# EAGLE board tvbgone-2layer (EAGLE 6.4)
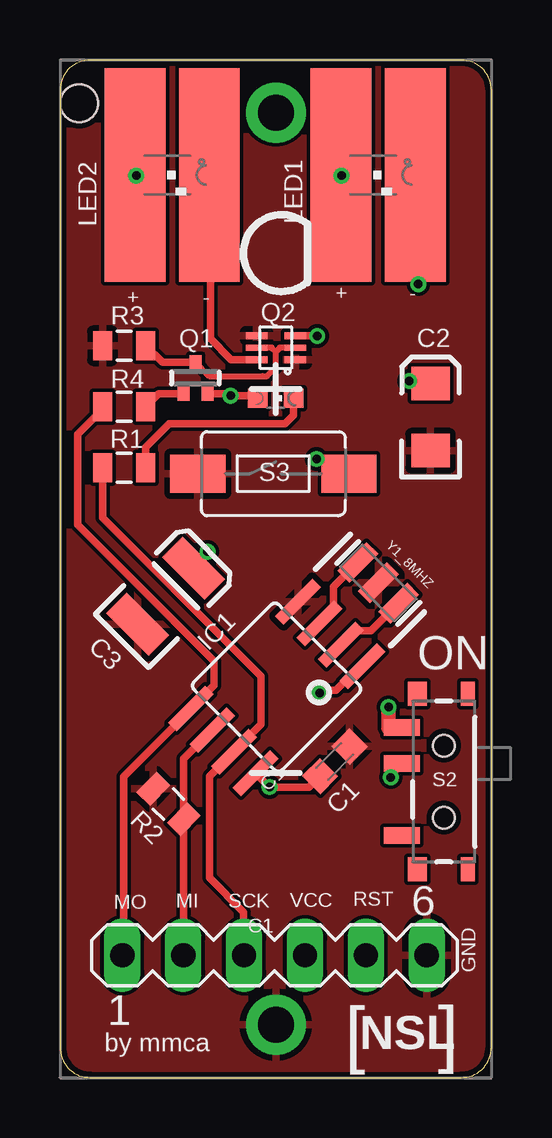
[diagram p0: board, top side]
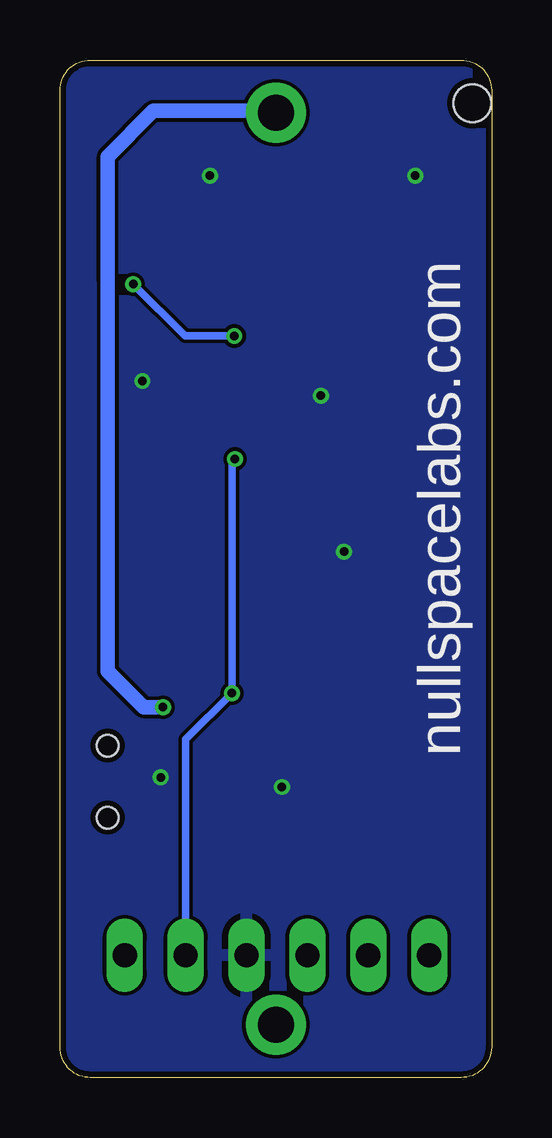
[diagram p1: board, bottom side, seen from below]

Size 18 x 42.4 mm. Coordinates in mm from the lower left corner, seen from the top.
Outline: 16.73,0 arc90 18,1.27 18,41.13 arc90 16.73,42.4 1.27,42.4 arc90 0,41.13 0,1.27 arc90 1.27,0 16.73,0
Copper layers (1*16): Top 0.035mm / dielectric 1.5mm / Bottom 0.035mm
Design rules "ITEADstudio_DRC": minimum track width 6mil, minimum drill 12mil, track to track 6mil, track to pad 6mil, pad to pad 6mil, via to via 6mil, smd to smd 0mil, copper to edge 10mil, drill to drill 10mil, minimum pad ring 10mil, minimum via ring 6mil, stop-mask expansion 2mil, vias tented up to drill 100mil, thermal gap 10mil

## Footprints (pad centres in the part's own frame; a part is rotated, then mirrored left to right if it is on the bottom)
BATTERY_CR123A = drill 1.5 pad 2.5: + 19,0; - -19,0 | hole 1.575: 19.4,8.2
C0603K = smd 1.05 x 1.08: 1 -0.875,0; 2 0.875,0
EIA3216 = smd 1.4 x 1.6: A 1.4,0; C -1.4,0
SPARKFUN_EIA3528 = smd 1.2 x 2.5: A 1.65,0; C -1.65,0
SOIC8 = smd 0.5 x 2.2: 1 -1.905,-3.154; 2 -0.645,-3.154; 3 0.625,-3.154; 4 1.895,-3.154; 5 1.905,3.154; 6 0.635,3.154; 7 -0.635,3.154; 8 -1.905,3.154
SIDE_IR_NSL@1 = smd 2.54 x 8.89: A -1.547,0; C 1.547,0
CHIPLED_0603 = smd 0.8 x 0.8: A 0,-0.75; C 0,0.75
SOT416 = smd 0.6 x 0.5: 1 -0.65,0; 2 0.65,-0.5; 3 0.65,0.5
SOT666 = smd 0.3 x 0.9: 1 -0.508,-0.813; 3 0.492,-0.813; 4 0.492,0.797; 6 -0.508,0.797 | smd 0.25 x 0.9: 2 -0.008,-0.813; 5 -0.008,0.797
0805 = smd 0.8 x 1.2: 1 -0.9,0; 2 0.9,0
SWITCH-SPST-SMD-A = smd 0.7 x 1.5: 1 -2.25,-1.75; 2 -0.75,-1.75; 3 2.25,-1.75 | smd 1 x 0.6: GND1 -3.65,1; GND3 3.65,1 | smd 1 x 0.8: GND2 -3.65,-1.1; GND4 3.65,-1.1 | hole 0.9: -1.5,0; 1.5,0
TACTILE-SWITCH-1101NE = smd 2.3 x 1.6: P$1 -3.15,0; P$2 3.15,0
CON-LSTB_MA06-1 = drill 1.016 long: 1 -6.35,0; 2 -3.81,0; 3 -1.27,0; 4 1.27,0; 5 3.81,0; 6 6.35,0
RESONATOR-SMD = smd 0.7 x 1.7: 1 -1.2,0; 2 0,0; 3 1.2,0

## Placement (x,y rotation side)
BAT1  CR123A  [BATTERY_CR123A]  9,21.2 90 top
C1  0.1uF  [C0603K]  11.46,13.18 45 top
C2  10uF  [EIA3216]  15.45,27.52 90 top
C3  [SPARKFUN_EIA3528]  4.4,20.05 45 top
IC1  ATTINY85V-10S  [SOIC8]  9.04,16.26 135 top
LED1  [SIDE_IR_NSL@1]  13.27,37.61 0 top
LED2  [SIDE_IR_NSL@1]  4.68,37.61 0 top
LED3  [CHIPLED_0603]  9,28.31 270 top
Q1  BC857AT115  [SOT416]  5.65,29.15 270 top
Q2  PMBT3904VS_DUAL_NPN  [SOT666]  9,30.42 90 top
R1  1.5K  [0805]  2.68,25.42 0 top
R2  10K  [0805]  4.53,11.4 315 top
R3  10K  [0805]  2.68,30.5 180 top
R4  1K  [0805]  2.68,27.96 180 top
S2  [SWITCH-SPST-SMD-A]  16.01,12.34 270 top
S3  SWITCH-MOMENTARY-2-SMD-1101NE  [TACTILE-SWITCH-1101NE]  8.9,25.16 0 top
SV1  [CON-LSTB_MA06-1]  8.95,5.1 0 top
Y1_8MHZ  RESONATOR  [RESONATOR-SMD]  13.28,20.62 315 top

## Library data of the parts
BAT1 = tvbgone-adj
C1 = rcl-ez
C2 R1-R4 Y1_8MHZ = SparkFun
C3 Q2 = tvbgone-2layer
IC1 = avr
LED1 LED2 = tvbgone3
LED3 = minimidi
Q1 = zetex
S2 S3 = SparkFun-Electromechanical
SV1 = NSL

## Nets
GND: BAT1.- C1.2 C2.C C3.C IC1.4 Q2.1 Q2.4 R2.1 R3.2 S3.P$1 SV1.6 Y1_8MHZ.2
MISO: IC1.6 R2.2 SV1.2
MOSI: IC1.5 R4.2 SV1.1
N$1: IC1.3 Y1_8MHZ.1
N$2: IC1.2 Y1_8MHZ.3
N$3: LED3.C R1.2
N$4: LED1.C Q2.3
N$5: LED2.C Q2.6
N$6: Q1.2 R4.1
N$8: BAT1.+ S2.1
N$9: Q1.1 Q2.2 Q2.5 R3.1
RST: IC1.1 S3.P$2 SV1.5
SCK: IC1.7 R1.1 SV1.3
VCC: C1.1 C2.A C3.A IC1.8 LED1.A LED2.A LED3.A Q1.3 S2.2 SV1.4

## Tracks (layer width: path | path; a pad name or v marks a point on that pad's centre or on a via)
GND
  pour Top: -0.04,42.28 18.22,42.28 18.22,0.12 -0.04,-0.09
MISO
  Top 0.305: 5.16,6.39 5.16,5.12 SV1.2 5.17,5.12 R2.2 5.17,13.29 IC1.6
MOSI
  Top 0.305: SV1.1 2.65,5.15 2.65,12.54 5.46,15.35 IC1.5 6.43,16.35 6.43,17.34 0.97,22.8 0.75,23.03 0.75,26.81 1.78,27.84 R4.2
N$1
  Top 0.305: Y1_8MHZ.1 11.41,20.45 11.41,19.57 10.82,18.99 IC1.3
N$2
  Top 0.305: Y1_8MHZ.3 12.97,18.61 12.3,18.61 IC1.2
N$3
  Top 0.305: R1.2 3.58,26.27 4.56,27.25 9.38,27.25 9.74,27.6 9.74,28.3 LED3.C
N$4  (via drill 0.36)
  Top 0.305: Q2.3 10.72,30.91 v10.73,30.9 | v14.94,33.06 14.94,37.1 LED1.C
  Bottom 0.305: v10.73,30.9 12.78,30.9 v14.94,33.06
N$5
  Top 0.305: Q2.6 7.15,29.91 6.28,30.78 6.28,36.44 LED2.C
N$6
  Top 0.305: R4.1 4.12,28.5 Q1.2
N$8  (via drill 0.36)
  Top 0.61: v13.7,15.43 13.7,14.59 S2.1
  Bottom 0.61: v13.7,15.43 14.51,15.43 16.01,16.93 16.01,33.19 16.01,38.37 14.11,40.28 9.08,40.28 BAT1.+
N$9
  Top 0.254: Q1.1 6.22,29.23 8.47,29.23 8.64,29.23 9,29.58 9,29.76 9,30.24 | 9,30.24 8.83,30.41 Q2.5 | Q2.2 9.17,30.41 9,30.24
  Top 0.305: R3.1 4.27,29.8 Q1.1
RST  (via drill 0.36)
  Top 0.305: IC1.1 12.51,17.15 11.51,16.15 10.96,16.15 v10.83,16.02 | S3.P$2 12,25.77 v10.7,25.77
  Bottom 0.305: SV1.5 12.76,14.09 v10.83,16.02 10.83,25.65 v10.7,25.77
SCK
  Top 0.305: SV1.3 7.65,5.12 7.65,6.9 6.23,8.32 6.23,12.56 IC1.7 8.39,14.72 8.39,15.54 8.39,16.73 1.79,23.33 1.79,25.41 R1.1
VCC  (via drill 0.36)
  Top 0.305: S2.2 13.8,12.63 v13.8,12.51 | IC1.8 8.73,12.11 v8.75,12.11 10.39,12.11 C1.1 | Q1.3 7.03,28.5 v7.12,28.41 8.15,28.41 LED3.A | C3.A 6.16,21.81 v6.16,21.91
  Top 0.61: LED2.A 3.19,36.39 v3.18,37.58 | LED1.A 12.36,36.39 v11.74,37.58 | v14.56,29.02 15.35,29.02 C2.A
  pour Bottom: -0.73,43.12 19.08,43.12 18.98,-0.44 -0.4,-0.77

## Text on the board
tPlace: ON
bPlace: nullspacelabs.com
_tsilk: + | - | + | - | C1 | MO | MI | SCK | VCC | RST | C1 | GND | by mmca | [ | NSL | ]